# EAGLE board Test_Board_RevII (EAGLE 7.3.0)
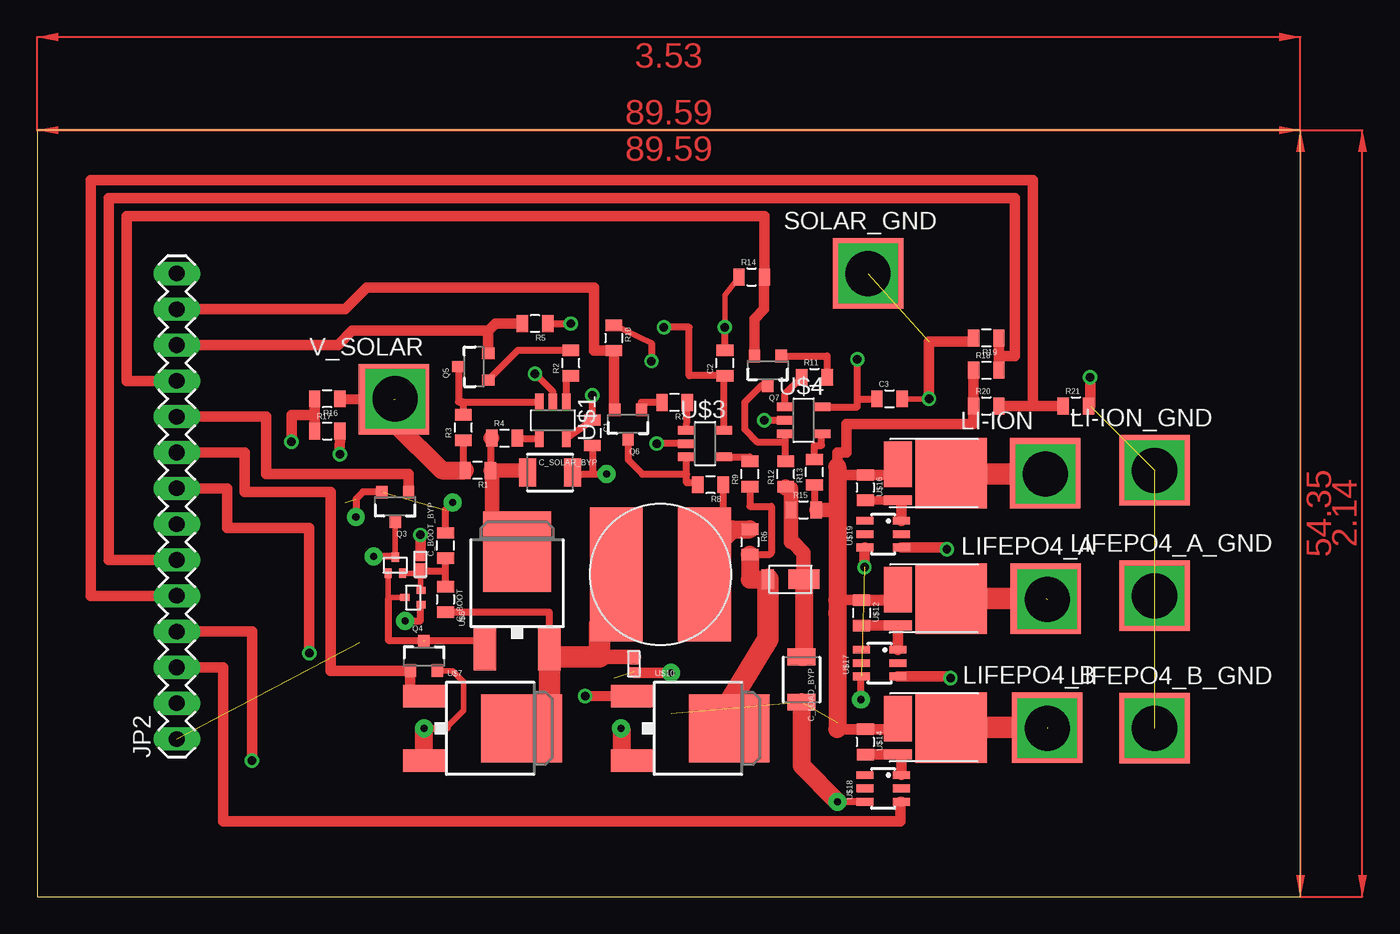
[diagram p0: board, top side]
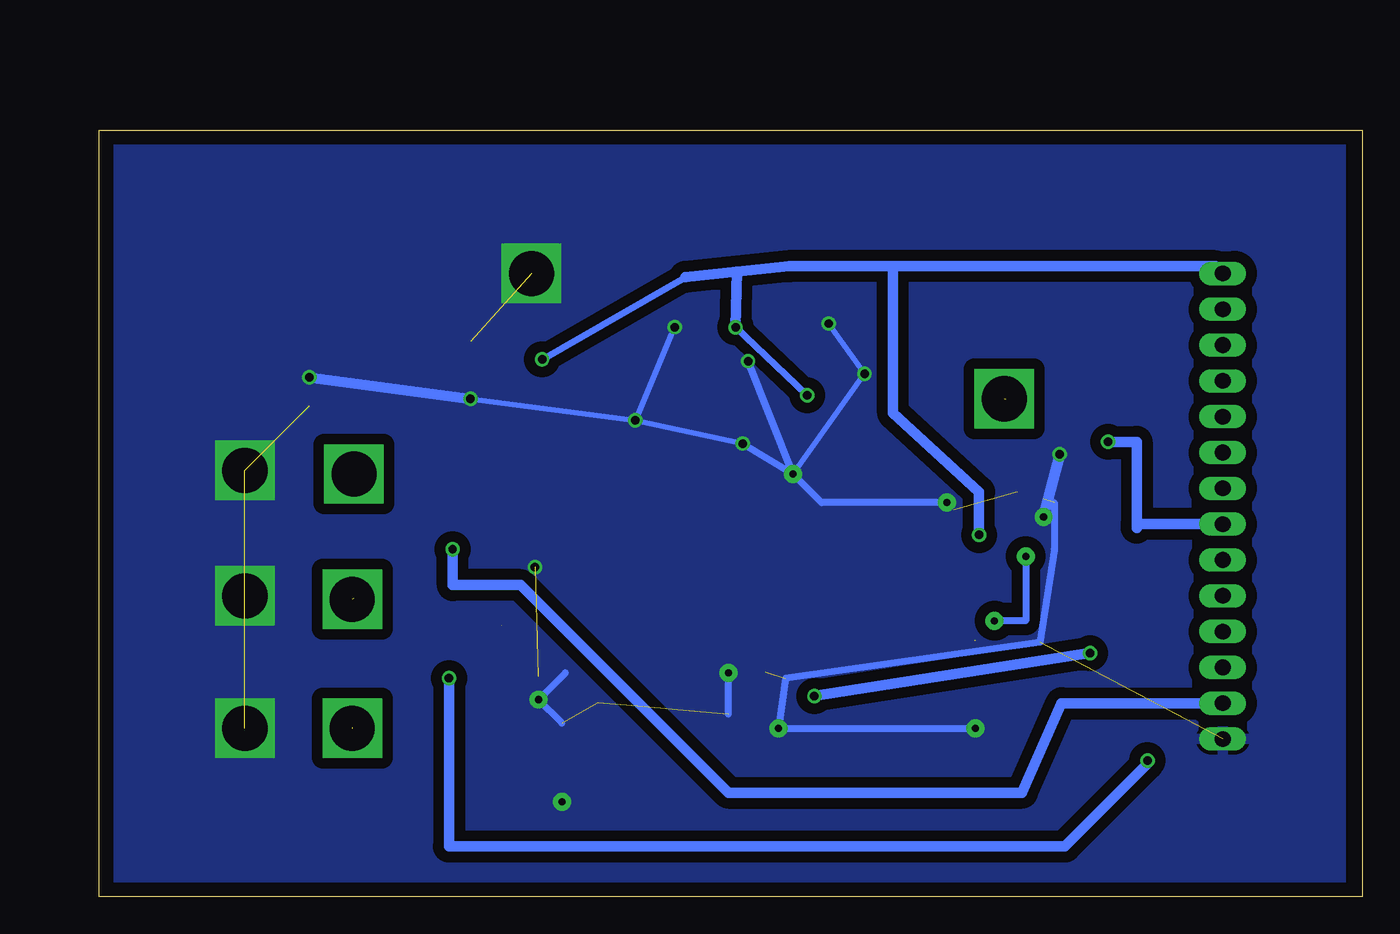
[diagram p1: board, bottom side, seen from below]

Size 89.59 x 54.35 mm. Coordinates in mm from the lower left corner, seen from the top.
Outline: 0,0 89.59,0 89.59,54.35 0,54.35 0,0
Copper layers (1*16): Top 0.035mm / dielectric 1.5mm / Bottom 0.035mm
Design rules "default": minimum track width 10mil, minimum drill 24mil, track to track 8mil, track to pad 8mil, pad to pad 8mil, via to via 8mil, smd to smd 8mil, copper to edge 40mil, drill to drill 8mil, minimum pad ring 10mil, minimum via ring 8mil, stop-mask expansion 4mil, vias tented up to drill 0mil, thermal gap 10mil

## Footprints (pad centres in the part's own frame; a part is rotated, then mirrored left to right if it is on the bottom)
0805 = smd 0.8 x 1.2: 1 -0.9,0; 2 0.9,0
1210 = smd 1.2 x 2: 1 -1.6,0; 2 1.6,0
SOD1608 = smd 0.65 x 0.8: ANODE 0.525,0 | smd 1.05 x 0.8: CATHODE -0.525,0
POWER_DI123 = smd 0.9 x 1.4: ANODE 1.45,0 | smd 2.2 x 1.4: CATHODE -1.1,0
1X14-LONGPADS = drill 1.118 long: 1 0,0; 2 2.54,0; 3 5.08,0; 4 7.62,0; 5 10.16,0; 6 12.7,0; 7 15.24,0; 8 17.78,0; 9 20.32,0; 10 22.86,0; 11 25.4,0; 12 27.94,0; 13 30.48,0; 14 33.02,0
POWER_PAD = smd 5 x 5: RAIL 0,0
SC-89 = smd 0.508 x 0.66: D 0,0.584; G -0.508,-0.559; S 0.508,-0.559
SOT23-3 = smd 0.8 x 0.9: D 0,1.1; G -0.95,-1; S 0.95,-1
SOT23-5 = smd 0.6 x 1.2: IN+ 0.95,-1.306; IN- 0.95,1.306; OUT -0.95,-1.306; V+ -0.95,1.306; V- 0,-1.306
DPAK = smd 4.826 x 5.715: D 0,1.588 | smd 1.6 x 3: G -2.28,-5.31; S 2.28,-5.31
SDE1006A_PKG = smd 3.75 x 9.5: ANODE 3.125,0; CATHODE -3.125,0
SO-8_POWER = smd 4.978 x 5.08: D 0,0 | smd 0.686 x 1.981: G 1.905,-3.785 | smd 3.226 x 1.981: S -0.635,-3.785
SOT23-6 = smd 0.55 x 1.2: D1 0.95,-1.3; D2 0,-1.3; D3 0,1.3; D4 0.95,1.3; G -0.95,-1.3; S -0.95,1.3

## Placement (x,y rotation side)
C1  0.1u  [0805]  39.37,32.89 270 top
C2  0.1u  [0805]  48.77,37.85 90 top
C3  0.1u  [0805]  60.45,35.31 0 top
C_BOOT  1u  [0805]  28.96,21.08 270 top
C_BOOT_BYP  1u  [0805]  28.96,24.89 90 top
C_LOAD_BYP  22u  [1210]  54.2,15.39 270 top
C_SOLAR_BYP  22u  [1210]  36.37,30.07 0 top
D_BOOT  PMEG4010EPK  [SOD1608]  27.18,23.62 90 top
D_LOAD  DFLS130L-7  [POWER_DI123]  53.26,22.5 180 top
JP2  M14LONGPADS  [1X14-LONGPADS]  9.91,11.18 90 top
LI-ION  [POWER_PAD]  71.48,30.02 0 top
LI-ION_GND  [POWER_PAD]  79.25,30.23 0 top
LIFEPO4_A  [POWER_PAD]  71.53,21.13 0 top
LIFEPO4_A_GND  [POWER_PAD]  79.25,21.34 0 top
LIFEPO4_B  [POWER_PAD]  71.63,11.99 0 top
LIFEPO4_B_GND  [POWER_PAD]  79.25,11.94 0 top
Q1  [SC-89]  25.4,23.5 0 top
Q2  [SC-89]  26.67,21.21 90 top
Q3  [SOT23-3]  25.4,27.69 180 top
Q4  [SOT23-3]  27.43,17.02 0 top
Q5  [SOT23-3]  30.99,37.59 90 top
Q6  [SOT23-3]  41.91,33.53 180 top
Q7  [SOT23-3]  51.82,37.34 180 top
R1  200m  [0805]  31.24,30.23 180 top
R2  100  [0805]  37.85,37.85 90 top
R3  200  [0805]  30.23,33.27 90 top
R4  200  [0805]  33.15,32.51 0 top
R5  18k  [0805]  35.31,40.64 180 top
R6  200m  [0805]  50.55,25.15 270 top
R7  100  [0805]  45.21,35.05 180 top
R8  200  [0805]  47.75,29.21 180 top
R9  200  [0805]  50.55,29.97 90 top
R10  600  [0805]  40.89,39.62 270 top
R11  100  [0805]  55.12,36.83 0 top
R12  200  [0805]  53.09,29.97 90 top
R13  200  [0805]  55.12,30.1 90 top
R14  8.2k  [0805]  50.67,43.94 0 top
R15  200m  [0805]  54.36,27.43 0 top
R16  98.8k  [0805]  20.57,35.31 180 top
R17  28k  [0805]  20.57,33.02 0 top
R18  12.7k  [0805]  67.31,37.34 0 top
R19  15.4k  [0805]  67.31,39.62 180 top
R20  53.6k  [0805]  67.31,34.8 0 top
R21  25.5k  [0805]  73.66,34.8 0 top
SOLAR_GND  [POWER_PAD]  58.93,44.2 0 top
U$1  LT6015  [SOT23-5]  36.58,33.78 180 top
U$3  LT6015  [SOT23-5]  47.37,32.13 270 top
U$4  LT6015  [SOT23-5]  54.36,33.78 270 top
U$6  NTD14N03RT4G  [DPAK]  34.04,22.86 0 top
U$7  NTD14N03RT4G  [DPAK]  32.77,11.94 270 top
U$8  SDE1006A  [SDE1006A_PKG]  44.2,22.86 180 top
U$10  NTD14N03RT4G  [DPAK]  47.5,11.94 270 top
U$11  SI4427BDY  [SO-8_POWER]  64.82,21.13 270 top
U$12  ERA-6AEB4993V  [0805]  58.47,20.12 270 top
U$13  SI4427BDY  [SO-8_POWER]  64.82,11.99 270 top
U$14  ERA-6AEB4993V  [0805]  58.72,10.97 270 top
U$15  SI4427BDY  [SO-8_POWER]  64.82,30.02 270 top
U$16  ERA-6AEB4993V  [0805]  58.72,29.01 270 top
U$17  STT6N3LLH6  [SOT23-6]  59.74,16.56 90 top
U$18  STT6N3LLH6  [SOT23-6]  59.99,7.67 90 top
U$19  STT6N3LLH6  [SOT23-6]  59.99,25.7 90 top
U$20  PMEG4010EPK  [SOD1608]  42.32,16.46 270 top
V_SOLAR  [POWER_PAD]  25.3,35.26 0 top

## Library data of the parts
C1-C3 C_BOOT C_BOOT_BYP C_LOAD_BYP C_SOLAR_BYP D_BOOT D_LOAD LI-ION LI-ION_GND LIFEPO4_A LIFEPO4_A_GND LIFEPO4_B LIFEPO4_B_GND Q1-Q7 R1-R21 SOLAR_GND U$1 U$3 U$4 U$6-U$8 U$10-U$20 V_SOLAR = MPPT_Lib
JP2 = SparkFun-Connectors

## Nets
5V0: C1.1 C2.1 C3.1 D_BOOT.ANODE JP2.14 U$1.V+ U$3.V+ U$4.V+
BATTERYOUT: D_LOAD.ANODE R6.2 R9.1 U$10.D
CHG_FEPO4_A: JP2.4 U$17.G
CHG_FEPO4_B: JP2.3 U$18.G
CHG_LION: JP2.2 U$19.G
DIODE_OUT: C_LOAD_BYP.1 D_LOAD.CATHODE R12.1 R15.1
GND: C1.2 C2.2 C3.2 C_BOOT_BYP.2 C_LOAD_BYP.2 C_SOLAR_BYP.2 JP2.1 LI-ION_GND.RAIL LIFEPO4_A_GND.RAIL LIFEPO4_B_GND.RAIL Q3.S Q4.S R5.1 R10.1 R14.1 R17.2 R19.2 R21.2 SOLAR_GND.RAIL U$1.V- U$3.V- U$4.V- U$7.S U$10.S U$17.S U$18.S U$19.S U$20.ANODE
INDUCTOR_CATH: R6.1 R8.1 U$8.CATHODE
ISENSE1: JP2.12 Q5.S R5.2
ISENSE2: JP2.13 Q6.S R10.2
ISENSE3: JP2.11 Q7.S R14.2
LI-ION_ANODE: U$15.D
LIFEPO4_A: LIFEPO4_A.RAIL U$11.D
LIFEPO4_B: LIFEPO4_B.RAIL U$13.D
N$1: Q1.D Q2.G Q3.D
N$3: C_BOOT.2 U$6.S U$7.D U$8.ANODE U$20.CATHODE
N$4: U$15.G U$16.2 U$19.D1
N$5: C_BOOT.1 C_BOOT_BYP.1 D_BOOT.CATHODE Q1.S Q2.S
N$6: U$11.G U$12.2 U$17.D1
N$8: U$13.G U$14.2 U$18.D1
N$20: Q5.D R3.2 U$1.IN+
N$21: R4.2 U$1.IN-
N$22: R2.1 U$1.OUT
N$23: Q5.G R2.2
N$25: Q7.D R12.2 U$4.IN+
N$26: Q6.D R8.2 U$3.IN+
N$27: R9.2 U$3.IN-
N$28: R7.1 U$3.OUT
N$29: Q6.G R7.2
N$31: R13.2 U$4.IN-
N$32: R11.1 U$4.OUT
N$33: Q7.G R11.2
PWM: JP2.10 Q3.G
PWM_BOOST: JP2.8 U$10.G
PWR_OUT: R13.1 R15.2 R18.1 R20.1 U$11.S U$12.1 U$13.S U$14.1 U$15.S U$16.1
RAIL: R1.2 R3.1 R16.1 V_SOLAR.RAIL
S$1: Q1.G Q2.D Q4.D U$6.G
S$2: C_SOLAR_BYP.1 R1.1 R4.1 U$6.D
VSENSE1: JP2.7 R16.2 R17.1
VSENSE2: JP2.6 R18.2 R19.1
VSENSE3: JP2.5 R20.2 R21.1
~PWM: JP2.9 Q4.G U$7.G

## Tracks (layer width: path | path; a pad name or v marks a point on that pad's centre or on a via)
5V0  (via drill 0.6, 0.6 pad 1.02)
  Top 0.508: C2.1 48.68,36.95 | 48.68,36.95 U$3.V+ | U$1.V+ C1.1 v39.37,35.56 | 58.17,35.31 58.17,34.73 U$4.V+ | 58.17,35.31 C3.1 | 48.68,36.95 46.23,36.95 46.23,40.39 v44.45,40.39 | 58.17,35.31 v58.17,38.1
  Top 0.762: D_BOOT.ANODE v27.18,25.65
  Bottom 0.508: v39.37,35.56 v44.45,40.39 | v58.17,38.1 48.01,43.94
  Bottom 0.762: 33.27,44.7 10.41,44.7 JP2.14 | 33.27,44.7 40.64,44.7 44.34,44.32 | 44.34,44.32 48.01,43.94 | v44.45,40.39 44.34,44.32 | v27.18,25.65 27.18,28.7 33.27,34.29 33.27,44.7
BATTERYOUT
  Top 0.508: 50.68,24.38 R6.2 51.93,24.25 52.07,24.38 52.07,27.69 50.55,27.69 R9.1
  Top 1.27: D_LOAD.ANODE 50.57,22.5 50.55,22.48 R6.2 | 49.09,13.78 U$10.D
  Top 1.524: D_LOAD.ANODE 51.82,18.29 49.09,13.78
CHG_FEPO4_A  (via drill 0.6 pad 1.02)
  Top 0.762: U$17.G 64.77,15.61 v64.77,15.49 | JP2.4 15.24,18.8 v15.24,9.65
  Bottom 0.762: v64.77,15.49 64.77,3.56 21.08,3.56 15.24,9.4 v15.24,9.65
CHG_FEPO4_B
  Top 0.762: U$18.G 61.21,6.72 61.21,5.33 13.21,5.33 13.21,16.26 JP2.3
CHG_LION  (via drill 0.6 pad 1.02)
  Top 0.762: U$19.G 64.52,24.76 v64.52,24.64
  Bottom 0.762: JP2.2 21.34,13.72 24.13,7.37 44.96,7.37 59.69,22.1 64.52,22.1 v64.52,24.64
DIODE_OUT
  Top 1.016: R12.1 53.09,28.96 53.47,28.96 R15.1 | R15.1 | R15.1 53.47,25.15 53.59,25.15 54.36,24.38 54.36,22.51 D_LOAD.CATHODE
  Top 1.27: D_LOAD.CATHODE 54.36,16.99 C_LOAD_BYP.1
GND  (via drill 0.5 pad 1.27, 0.6, 0.6 pad 1.02, 3.2 pad 4.19)  (11 unrouted)
  Top 0.406: Q3.S 24.38,28.69 24.38,28.7 | 28.39,16.13 28.39,16.02 Q4.S 29.45,16.02 30.23,15.24 30.23,13.21 28.96,11.94 | C3.2 v63.25,35.31 | 43.56,39.24 R10.1 | v48.77,40.39 48.77,42.67 R14.1
  Top 0.508: 41.43,11.91 v41.4,11.94 | 42.38,15.88 U$20.ANODE | 41.43,9.68 41.4,9.65 U$10.S | 27.43,11.94 v27.46,11.94 28.96,11.94 29.08,11.94 | U$18.S v56.77,6.73 | v58.42,13.97 58.42,15.59 U$17.S | C_SOLAR_BYP.2 37.97,29.97 39.37,29.97 | 40.39,30.07 v40.39,29.97 39.37,29.97 | 24.45,28.7 24.38,28.7 23.11,28.7 22.61,28.19 v22.61,26.92 | U$1.V- 36.58,35.81 v35.31,37.08 | U$3.V- v43.94,32.13 | C2.2 v48.77,40.39 | U$4.V- v51.56,33.78 | R5.1 v37.85,40.64 | 43.56,39.24 v43.56,37.97 | 39.37,29.97 C1.2 | C_BOOT_BYP.2 28.96,27.43 v29.46,27.94 | C_BOOT_BYP.2 29.07,25.79 29.21,25.65 28.96,25.65 C_BOOT_BYP.2
  Top 0.762: v44.96,15.88 42.38,15.88 | R19.2 66.41,39.37 63.25,39.37 v63.25,35.31 | R21.2 74.68,34.8 v74.68,36.83 | R17.2 v21.46,31.37 | U$19.S 58.67,24.73 v58.67,23.37
  Top 1.27: 41.43,11.91 41.43,9.68 | U$7.S v27.46,11.94 | C_LOAD_BYP.2 54.2,9.3 v56.77,6.73
  Bottom 0.406: v40.39,29.97 v35.31,37.08 v37.85,40.64 | v51.56,33.78 v43.94,32.13 | v63.25,35.31 v51.56,33.78 | v48.77,40.39 v51.56,33.78
  Bottom 0.508: 44.96,12.95 v44.96,15.88 | v27.46,11.94 v41.4,11.94 40.89,15.49 22.86,18.03 21.84,24.64 21.84,27.94 | 56.77,12.32 v58.42,13.97 56.52,15.88 | v29.46,27.94 38.35,27.94 v40.39,29.97 | v43.94,32.13 v40.39,29.97 | v40.39,29.97 v43.56,37.97
  Bottom 0.762: v74.68,36.83 v63.25,35.31 | v21.46,31.37 v22.61,26.92
  other vias: 79.25,30.23 79.25,21.34 79.25,11.94 58.93,44.2
  pour Bottom (isolate 0.762): 1.52,53.34 1.52,0.76 88.65,0.76 88.65,53.34
INDUCTOR_CATH
  Top 0.508: 48.77,25.52 48.65,25.63 R8.1
  Top 1.016: 47.32,23.11 U$8.CATHODE 47.24,22.94 47.24,25.4 47.36,25.52 48.77,25.52
  Top 1.27: 47.24,25.91 47.24,25.4 | 48.77,25.52 49.3,26.05 R6.1
ISENSE1
  Top 0.762: Q5.S 31.99,40.12 | 31.99,40.12 32.51,40.64 R5.2 | 31.99,40.12 31.97,40.13 22.35,40.13 21.34,39.12 JP2.12
ISENSE2
  Top 0.762: Q6.S 40.89,34.59 R10.2 39.5,38.73 39.5,43.18 23.37,43.18 21.84,41.66 JP2.13
ISENSE3
  Top 0.762: Q7.S 50.87,40.96 51.56,41.66 51.56,43.93 R14.2 51.57,48.26 6.35,48.26 6.35,36.58 JP2.11
LI-ION_ANODE  (via drill 3.2 pad 2.54)
  Top 1.524: U$15.D 64.82,29.97 v71.5,29.97
LIFEPO4_A  (via drill 3.2 pad 2.54)  (1 unrouted)
  Top 1.524: U$11.D LIFEPO4_A.RAIL
  other vias: 71.63,21.08
LIFEPO4_B  (via drill 3.2 pad 2.54)  (1 unrouted)
  Top 1.524: U$13.D LIFEPO4_B.RAIL
  other vias: 71.63,11.94
N$1  (via drill 0.5 pad 1.27)
  Top 0.406: 25.4,24.13 Q1.D Q3.D | Q2.G 27.18,20.7 27.18,20.52
  Top 0.508: 25.4,24.13 v23.88,24.13 | v26.09,19.56 27.18,19.56 27.18,20.52
  Bottom 0.508: v23.88,24.13 23.88,19.56 v26.09,19.56
N$3
  Top 0.508: C_BOOT.2 36.32,20.18 U$6.S 36.32,17.29 | 36.32,13.87 36.58,13.87 36.32,13.97
  Top 1.016: U$20.CATHODE 40.89,17 39.87,17
  Top 1.27: U$8.ANODE 40.39,22.86 40.39,20.32 39.88,20.32 39.88,19.3 39.88,18.8
  Top 1.524: 36.32,17.29 36.32,17.02 | 36.32,17.02 36.32,13.97 | U$7.D 36.28,13.87 36.32,13.87 | 36.32,17.02 39.87,17 39.88,19.3
N$4
  Top 0.508: 61.3,27.86 U$15.G
  Top 0.61: U$16.2 U$15.G
  Top 0.762: U$19.D1 61.3,27.86
N$5
  Top 0.406: Q1.S 27.18,22.94 D_BOOT.CATHODE 27.18,21.72 Q2.S
  Top 0.508: C_BOOT.1 28.96,23.11 | 28.96,23.11 C_BOOT_BYP.1 | D_BOOT.CATHODE 28.96,23.11 | 27.18,23.06 D_BOOT.CATHODE | D_BOOT.CATHODE 27.23,23.1
N$6  (2 unrouted)
  Top 0.762: U$12.2 U$11.G | U$11.G U$17.D1
N$8
  Top 0.508: 61.04,10.07 U$13.G 60.96,10.08 60.96,10.16
  Top 0.762: U$14.2 61.04,10.07 61.3,10.07 U$18.D1
N$20
  Top 0.508: R3.2 30.23,35.09 | 30.23,35.09 U$1.IN+ | Q5.D 29.89,35.09 30.23,35.09
N$21
  Top 0.508: R4.2 34.05,32.48 U$1.IN-
N$22
  Top 0.508: R2.1 37.53,36.63 U$1.OUT
N$23
  Top 0.508: Q5.G 34.09,38.75 R2.2
N$25
  Top 0.508: R12.2 53.06,32.26 | 53.06,32.26 U$4.IN+ | Q7.D 51.35,36.24 50.16,35.05 50.16,33.15 51.05,32.26 53.06,32.26
N$26
  Top 0.508: R8.2 46.85,29.35 46.06,29.35 46.06,29.97 | 46.06,29.97 U$3.IN+ | Q6.D 41.91,30.99 42.93,29.97 46.06,29.97
N$27
  Top 0.508: 50.55,30.73 R9.2 50.55,31.18 U$3.IN-
N$28
  Top 0.508: U$3.OUT R7.1
N$29
  Top 0.508: R7.2 42.86,35.05 Q6.G
N$31
  Top 0.508: R13.2 55.12,32 55.63,32 55.63,32.83 U$4.IN-
N$32
  Top 0.508: U$4.OUT 53.05,35.66 R11.1
N$33
  Top 0.508: Q7.G 56.02,38.34 R11.2
PWM
  Top 0.762: Q3.G 26.35,29.97 16.26,29.97 16.26,34.04 JP2.10
PWM_BOOST  (via drill 0.6)
  Top 0.762: v38.86,14.22 U$10.G | JP2.8 13.46,28.96 13.46,26.16 19.3,26.16 v19.3,17.27
  Bottom 0.762: v19.3,17.27 v38.86,14.22
PWR_OUT
  Top 0.508: 61.27,11.87 61.27,11.74 | 61.52,21.13 61.52,21.64 | 61.04,29.91 U$15.S | 58.67,29.96 U$16.1 | R13.1 55.12,27.43 R15.2
  Top 0.762: 61.04,29.91 U$16.1 56.74,29.91 56.74,30.48 56.77,30.48 56.77,31.5 57.4,31.5 57.4,33.53 66.41,33.53 R20.1 R18.1 | U$12.1 61.04,21.02 61.04,21.64 | 61.04,21.64 U$11.S 60.96,21.77 60.96,21.59 61.01,21.59 61.01,21.03 56.74,21.03 | 61.27,11.87 61.04,11.87 | 61.04,11.87 U$13.S | 61.04,11.87 U$14.1 56.74,11.87 56.74,11.89 | 61.52,21.64 61.04,21.64
  Top 1.016: U$15.S 60.96,30.66 60.96,30.48 | 56.63,20.18 56.74,20.07 | R15.2 56.74,27.43
  Top 1.27: 56.74,30.48 56.74,27.43 56.74,21.03 56.74,20.07 56.74,11.89
RAIL  (via drill 3.2 pad 2.54)  (1 unrouted)
  Top 0.508: 30.23,30.23 R3.1
  Top 0.762: R16.1 21.59,35.31 V_SOLAR.RAIL
  Top 1.016: R1.2 30.23,30.23
  Top 1.27: v25.4,35.31 25.4,33.53 28.7,30.23 R1.2
S$1  (1 unrouted)
  Top 0.406: Q1.G 24.89,21.21 | Q2.D 24.89,21.21 | Q4.D 27.18,18.12 27.18,18.19 | 24.89,21.21 24.89,21.08
  Top 0.508: U$6.G 31.76,18.16 31.75,18.16 27.49,18.16 | 27.43,18.19 27.18,18.19 24.89,18.19 24.89,21.08
  Top 0.813: 31.76,17.61 U$6.G
S$2
  Top 0.406: U$6.D 34.04,25.15 32.26,26.92
  Top 0.508: 32.14,32.51 R1.1 | 32.26,24.64 32.77,24.64 32.77,25.4
  Top 1.016: R4.1 32.14,32.51 | C_SOLAR_BYP.1 34.77,30.23 R1.1 32.26,30.23 32.26,26.92
  Top 1.27: 32.26,26.92 32.26,24.64
VSENSE1  (via drill 0.6 pad 1.02)
  Top 0.762: R17.1 R16.2 19.69,34.16 18.03,34.16 v18.03,32.26
  Bottom 0.762: v18.03,32.26 16,32.26 16,26.42 | JP2.7 16,26.42 | 16,26.42 16,26.16
VSENSE2
  Top 0.762: R19.1 R18.2 68.2,38.35 69.34,38.35 69.34,49.53 5.08,49.53 5.08,23.88 JP2.6
VSENSE3
  Top 0.762: R20.2 70.61,34.8 | 70.61,34.8 R21.1 | 70.61,34.8 70.61,50.8 3.81,50.8 3.81,21.34 JP2.5
~PWM
  Top 0.406: Q4.G 26.47,15.49
  Top 0.762: 26.47,16.1 26.47,15.49 26.47,14.22 U$7.G | Q4.G 26.48,16 20.83,16 20.83,28.7 14.73,28.7 14.73,31.5 JP2.9
(copper drawn outside any net)
  shapes: Top area x5